# Altium PCB AD9854_V2.1_20130905.PcbDoc (part 3 of 3)
Units mil, origin at the board's own origin, x right, y up, seen from the top; angles counter-clockwise.
Board outline 3519.8 x 3096.6 mil, 2 copper layers (Top Layer, Bottom Layer); 99 components, 61 nets, 371 pads, 189 vias.
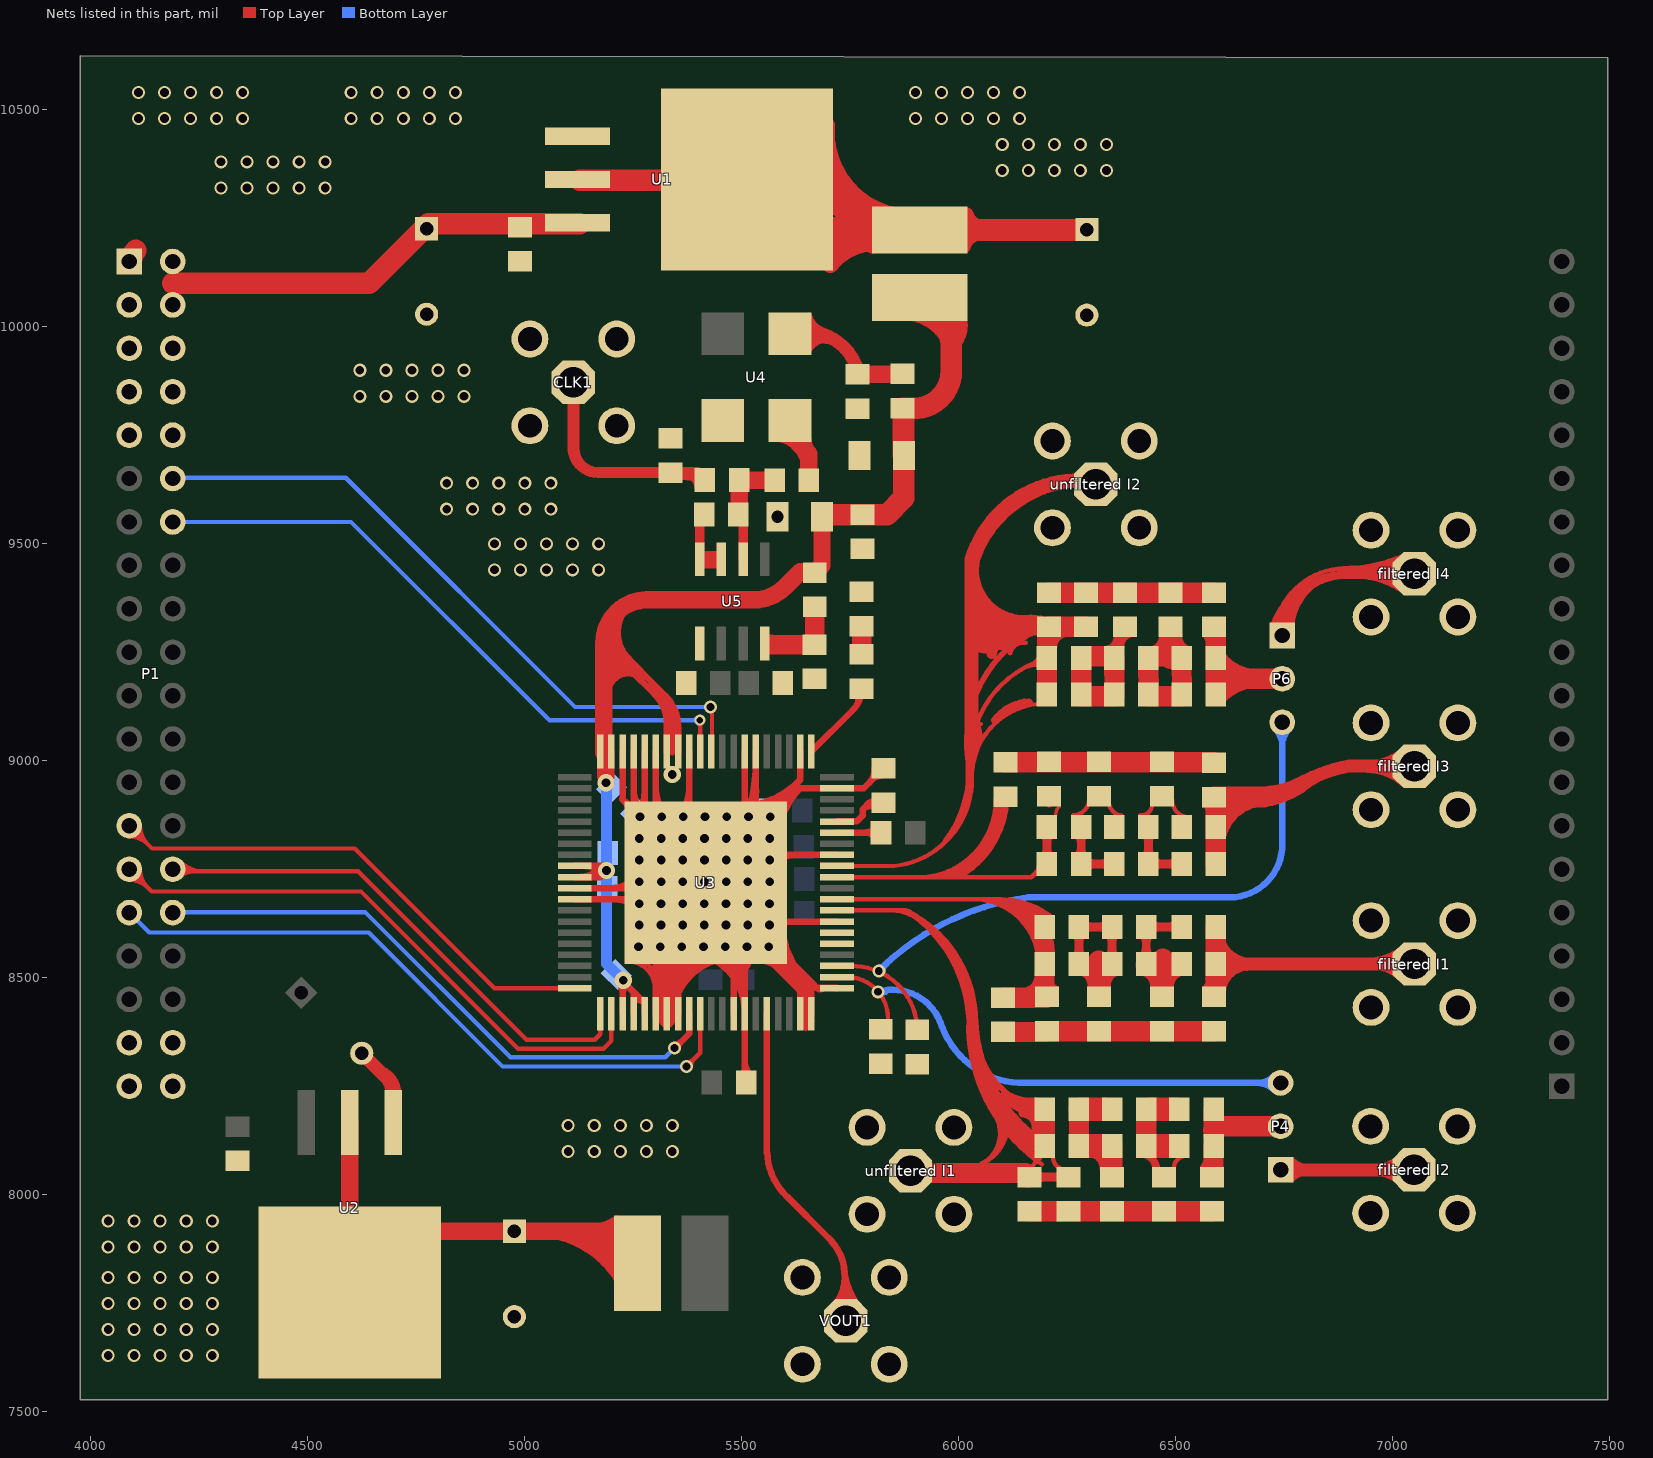
[diagram p3: the nets of this part, all layers, seen from the top]

## Via types
v1: diameter 30, hole 20, Top Layer to Bottom Layer, 120 vias
v2: diameter 40, hole 20, Top Layer to Bottom Layer, 60 vias
v3: diameter 30, hole 18, Top Layer to Bottom Layer, 5 vias
v4: diameter 100, hole 50, Top Layer to Bottom Layer, 2 vias
v5: diameter 50, hole 28, Top Layer to Bottom Layer, 1 vias
v6: diameter 25, hole 15, Top Layer to Bottom Layer, 1 vias

## Nets (pads, with @x,y where several pads share a name; then routed paths per layer and width w, separated by ;. In a path a pad name is that pad's centre, name@x,y a point inside that pad or via, vN(x,y) a via of type N, cw(c..) or ccw(c..) an arc to the next point about the centre after c; other vN are vias at no path point) (continued)
DGND: (continued)
  Top Layer w15: U3.81@5540.38,8861.12 cw(c5549.21,8852.37) 5557.18,8861.91 ccw(c5549.21,8852.37) U3.81@5540.38,8861.12 ; U3.81@5542.08,8814.44 cw(c5571.82,8811.38) 5552.96,8834.58 ccw(c5571.82,8811.38) U3.81@5542.08,8814.44 ; U3.81@5543.89,8808.36 ccw(c5599.85,8811.26) 5562.33,8769.64 cw(c5599.85,8811.26) U3.81@5543.89,8808.36
  Top Layer w30: C7.2@4624.4,8326.4 4696.8,8254 U2.1@4696.8,8166.5
  Top Layer w40: U3.81@5298.95,8601.41 cw(c5230.09,8532.56) U3.81@5327.47,8532.56 ; v2(5313.6,8622) cw(c5280.12,8588.52) U3.81@5327.47,8588.52 ; U3.27@5327.47,8404.51 cw(c5482.11,8404.51) U3.81@5450.82,8555.95 ; U3.27@5327.47,8417.5 5327.47,8629.93 ccw(c5393.51,8629.93) v2(5361.8,8572) ; U3.27@5327.47,8453.62 cw(c5471.96,8453.62) U3.81@5442.73,8595.13 ; 5327.47,8489.11 cw(c5444.69,8489.11) v2(5361.8,8572) ; 5327.47,8502.73 cw(c5461.82,8502.73) U3.81@5434.64,8634.3 ; U3.81@5327.47,8534.18 ccw(c5273.98,8534.18) v2(5311.8,8572) ; U3.81@5327.47,8534.77 cw(c5450.83,8534.77) v2(5363.6,8622) ; U3.81@5327.47,8551.83 cw(c5451.67,8551.83) U3.81@5426.54,8673.47 ; U3.81@5327.47,8609.82 cw(c5273.98,8609.82) v2(5311.8,8572) ; U3.81@5341.05,8546.9 cw(c5381.72,8534.4) v2(5361.8,8572) ; U3.81@5344.03,8599.9 cw(c5380.49,8587.33) v2(5363.6,8622) ; U3.81@5347.04,8589.63 cw(c5308.14,8623.35) v2(5311.8,8572) ; U3.81@5358.66,8612.17 ccw(c5290.72,8647.3) v2(5363.6,8670.5) ccw(c5390.05,8705.08) U3.81@5407.41,8665.15 ; 5361.02,8530.51 ccw(c5311.33,8552.19) v2(5361.8,8572) ; U3.81@5361.03,8573.06 ccw(c5303.24,8600.64) v2(5363.6,8622) ; U3.81@5378.26,8596.63 ccw(c5399.76,8564.45) v2(5361.8,8572) ; U3.81@5379.69,8644.4 ccw(c5398.68,8613.78) v2(5363.6,8622) ; U3.81@5393.4,8560.51 cw(c5416.48,8544.05) v2(5411.8,8572) cw(c5448.92,8553.45) U3.81@5435.79,8592.81 ; U3.81@5404.8,8575.58 cw(c5378.98,8625.69) v2(5361.8,8572) ; U3.81@5413.9,8624.48 cw(c5385.75,8683.96) v2(5363.6,8622) ; U3.81@5445.72,8553.39 ccw(c5431.3,8582.1) v2(5461.8,8572) ; C30.1@6208.03,8997.5 C31.1@6323.03,8997.5 C32.1@6468.03,8997.5 C33.1@6583.03,8997.5
  Top Layer w47: R2.1@6102.03,8375.5 C12.1@6201.03,8375.5 ; R9.1@6107.03,8996.5 C33.1@6587.03,8996.5 ; R8.1@6163.03,7962.5 C23.1@6253.03,7962.5 C24.1@6353.03,7962.5 C25.1@6473.03,7962.5 C26.1@6583.03,7962.5 ; C12.1@6203.03,8377.5 C13.1@6323.03,8377.5 C14.1@6468.03,8377.5 C15.1@6588.03,8377.5 ; R10.1@6208.03,9387.5 C37.1@6293.03,9387.5 C38.1@6383.03,9387.5 C39.1@6488.03,9387.5 C40.1@6588.03,9387.5
  other v1: 4040,7630 4100,7630 4160,7630 4220,7630 4280,7630 4040,7690 4100,7690 4160,7690 4220,7690 4280,7690 4040,7750 4100,7750 4160,7750 4220,7750 4280,7750 4040,7810 4100,7810 4160,7810 4220,7810 4280,7810 4040,7880 4100,7880 4160,7880 4220,7880 4280,7880 4040,7940 4100,7940 4160,7940 4220,7940 4280,7940 5100,8100 5160,8100 5220,8100 5280,8100 5340,8100 5100,8160 5160,8160 5220,8160 5280,8160 5340,8160 4930,9440 4990,9440 5050,9440 5110,9440 5170,9440 4930,9500 4990,9500 5050,9500 5110,9500 5170,9500 4820,9580 4880,9580 4940,9580 5000,9580 5060,9580 4820,9640 4880,9640 4940,9640 5000,9640 5060,9640 4620,9840 4680,9840 4740,9840 4800,9840 4860,9840 4620,9900 4680,9900 4740,9900 4800,9900 4860,9900 4300,10320 4360,10320 4420,10320 4480,10320 4540,10320 6100,10360 6160,10360 6220,10360 6280,10360 6340,10360 4300,10380 4360,10380 4420,10380 4480,10380 4540,10380 6100,10420 6160,10420 6220,10420 6280,10420 6340,10420 4110,10480 4170,10480 4230,10480 4290,10480 4350,10480 4600,10480 4660,10480 4720,10480 4780,10480 4840,10480 5900,10480 5960,10480 6020,10480 6080,10480 6140,10480 4110,10540 4170,10540 4230,10540 4290,10540 4350,10540 4600,10540 4660,10540 4720,10540 4780,10540 4840,10540 5900,10540 5960,10540 6020,10540 6080,10540 6140,10540
  other v2: 5261.8,8572 5511.8,8572 5561.8,8572 5263.6,8622 5413.6,8622 5463.6,8622 5513.6,8622 5563.6,8622 5263.6,8670.5 5313.6,8670.5 5413.6,8670.5 5463.6,8670.5 5513.6,8670.5 5563.6,8670.5 5264,8721.5 5314,8721.5 5364,8721.5 5414,8721.5 5464,8721.5 5514,8721.5 5564,8721.5 5264,8771.5 5314,8771.5 5364,8771.5 5414,8771.5 5464,8771.5 5514,8771.5 5564,8771.5 5264,8821 5314,8821 5364,8821 5414,8821 5464,8821 5514,8821 5564,8821 5265.2,8871.5 5315.2,8871.5 5365.2,8871.5 5415.2,8871.5 5465.2,8871.5 5515.2,8871.5 5565.2,8871.5
  other v5: 5582.45,9562.5
DVDD: C6.1 C19.1 C42.1 C50.2 C51.2 C52.2 C53.2 L2.2 L6.2 L16.2 U3.9 U3.10 U3.23 U3.24 U3.25 U3.73 U3.74 U3.79 U3.80 | length 4719
  Top Layer w15: U3.10@5115.03,8732.3 5173.03,8732.3 ; U3.9@5115.03,8757.89 5177.85,8757.89 v2(5188.23,8747.5) 5173.03,8732.3 ; U3.10@5121.35,8732.3 ccw(c5121.35,8814.39) v2@5179.39,8756.34 ; U3.9@5132.98,8757.89 cw(c5132.98,8692.25) v2@5179.39,8738.66 ; 5157.56,8732.3 ccw(c5157.56,8778.17) v2@5190,8745.73 ; 5169.2,8757.89 cw(c5169.2,8728.46) v2@5190,8749.27 ; 5173.92,8975.12 ccw(c5212.65,8975.12) v2@5185.27,8947.73 ; U3.80@5173.92,9011.33 ccw(c5248.86,9011.33) v2@5195.87,8958.34 ; U3.80@5173.92,9021.5 5173.92,8962.61 v2(5187.03,8949.5) ; v2@5176.18,8744.19 cw(c5164.37,8740.95) 5173.03,8732.3 ; v2@5178.19,8958.34 ccw(c5127.88,9008.65) U3.79@5199.03,9008.65 ; 5182.03,9018.72 5187.03,9013.72 v2(5187.03,8949.5) ; 5182.03,9271 5243.61,9209.42 5298.18,9154.86 cw(c5227.47,9084.15) 5327.47,9084.15 U3.74@5327.47,9021.5 ; 5183.85,9289.83 5213.43,9260.25 5323.77,9149.91 cw(c5253.06,9079.2) 5353.06,9079.2 U3.73@5353.06,9021.5 ; v2@5184.93,8735.45 ccw(c5181.69,8723.64) 5173.03,8732.3 ; v2@5188.8,8947.73 ccw(c5164.1,8972.43) 5199.03,8972.43 ; U3.79@5199.51,9021.5 5199.03,9021.02 5199.03,8961.5 v2(5187.03,8949.5) ; v2@5217.79,8485.66 cw(c5200.15,8468.01) 5225.1,8468.01 ; U3.23@5225.1,8417.5 5225.1,8492.97 5250.69,8467.38 ; 5225.1,8460.63 cw(c5260.5,8460.63) v2@5235.47,8485.66 ; U3.24@5250.69,8417.5 5250.69,8467.38 ; U3.24@5250.69,8449 cw(c5257.06,8422.56) U3.25@5276.28,8441.79 ; 5263.98,8454.1 ccw(c5276.29,8466.41) U3.25@5276.29,8449 ; U3.25@5276.29,8417.5 U3.25@5276.29,8441.79 ; 5289.63,9173.5 5310.94,9152.19 cw(c5240.23,9081.48) 5340.23,9081.48 ; U3.74@5327.47,9053 ccw(c5302.09,9081.48) 5340.23,9081.48 ; 5340.23,9019.5 5340.23,9081.48 ; U3.73@5353.06,9053 cw(c5378.26,9081.48) 5340.23,9081.48 ; C42.1@5684.81,9562.5 C42.1@5689.31,9567 ; L6.2@5870.43,9818.26 L6.2@5890.79,9818.26 ; 5250.69,8467.38 U3.25@5276.29,8441.79
  Top Layer w30: 5189.43,9178.5 cw(c5238.53,9155.4) 5243.61,9209.42 cw(c5238.53,9155.4) 5253.53,9207.55 ; 5191.63,9214 ccw(c5190.58,9231.45) 5208.03,9232.5 ; 5230.63,9357.5 ccw(c5297.63,9295.5) 5229.18,9355.89 ccw(c5297.63,9295.5) 5213.43,9260.25 ccw(c5297.63,9295.5) 5235.63,9228.5 ; L2.2@5849.12,10029.64 cw(c5867.66,9907.13) 5982.63,9953.32 ; L2.2@5981.63,10050 cw(c5945.53,10002.1) 5993.43,9966
  Top Layer w40: 5182.03,9018.72 5182.03,9271 cw(c5282.03,9271) 5229.18,9355.89 cw(c5282.03,9271) 5282.03,9371 5528.01,9371 ccw(c5528.01,9471) 5598.72,9400.29 5634.43,9436 ; L16.2@5668.03,9433.74 5684.81,9450.52 C42.1@5684.81,9562.5
  Top Layer w50: C42.1@5689.31,9567 C6.1@5778.43,9567 5834.53,9567 5873.21,9605.68 C19.1@5873.21,9704 5872.53,9704.68 L6.2@5872.53,9812.76 ; L6.2@5870.43,9812.76 L6.2@5872.53,9812.76 ; L6.2@5893.82,9811.82 ccw(c5895.93,9898.5) 5982.61,9896.4 ; L6.2@5895.93,9812.76 L6.2@5872.53,9812.76 ; L2.2@5909.63,10067.74 5953.34,10024.03 cw(c5882.63,9953.32) 5982.63,9953.32 5982.63,9898.5 ; 5969.82,9995.5 cw(c6000.6,10013.27) L2.2@5981.44,10043.21
  Bottom Layer w15: v2(5187.03,8949.5) 5198.03,8949.5 5199.03,8948.5 C50.2@5188.43,8937.9
  Bottom Layer w25: C50.2@5181.73,8944.2 cw(c5165.55,8928.01) C50.2@5188.43,8928.01 ; 5188.23,8532.9 v2(5188.23,8747.5) ; 5188.43,8532.7 v2(5226.63,8494.5) ; v2@5188.43,8747.5 C50.2@5188.43,8937.9
  other v2: 5340,8968.5
DVDDIN: C1.1 C3.1 P1.1 P1.2 P1.3 P1.4 U1.3 | length 1050.8
  Top Layer w50: 4189.2,10100.5 4641.23,10100.5 4772.8,10232.07 4778.23,10237.5 U1.3@5126.6,10237.5 ; P1.1@4093.36,10150.5 cw(c4129.4,10150.5) 4103.92,10175.98 ccw(c4129.4,10150.5) P1.1@4093.36,10150.5
FSK: P1.32 U3.29 | length 1419.9
  Top Layer w15: v3@5344.83,8346 ccw(c5344.83,8365.8) 5358.83,8351.8 ; v3@5345.18,8338.15 5378.65,8371.61 U3.29@5378.65,8417.5 ; v3@5352.33,8338.5 cw(c5368.75,8338.5) 5357.14,8350.11
  Bottom Layer w10: P1.32@4193.83,8651 4632.73,8651 4966.73,8317 5323.33,8317 v3(5344.83,8338.5)
NetC4_1: C4.1 L1.1 U2.2 U2.4 | length 2096.3
  Top Layer w25: C4.1@4995.83,7914 cw(c5022.09,7684.87) L1.1@5236.23,7770.5 ; 5075.97,7910.81 cw(c5089.23,7752.2) L1.1@5247.03,7773 ; 5146.23,7893.5 cw(c5194.82,7860.16) L1.1@5213.63,7916 ; 5161.43,7916.43 cw(c5168.03,7863.83) L1.1@5220.63,7870.43 ; 5162.18,7921.31 ccw(c5141.88,8053.55) L1.1@5213.43,7940.5 ; 5185.68,7917.77 cw(c5180.03,7828.43) L1.1@5247.2,7887.61 ; 5195.11,7917.17 ccw(c5198.34,7968.22) L1.1@5232.15,7929.84 ; L1.1@5233.03,7910.5 cw(c5204.61,7944.85) 5170.25,7916.43 L1.1@5265.68,7821
  Top Layer w40: U2.2@4596.8,8166.5 U2.4@4596.8,7775.5 4737.73,7916.43 C4.1@4976.03,7916.43 5170.25,7916.43
NetC8_1: C8.1 L2.1 U1.2 U1.4 | length 2378
  Top Layer w30: L2.1@6013.03,10185.5 cw(c6049.53,10176) 6059.03,10212.5 ; L2.1@6019.23,10260.5 ccw(c6051.63,10265.9) 6057.03,10233.5
  Top Layer w40: U1.4@5694.65,10464.07 ccw(c5891.78,10449.35) L2.1@5855.63,10255 ; U1.4@5703.83,10144.5 cw(c5807.91,10060.24) L2.1@5830.96,10192.15 ; L2.1@5800.52,10189.44 ccw(c5793,10273.89) L2.1@5858.03,10219.49
  Top Layer w50: U1.2@5126.6,10337.5 U1.4@5517.6,10337.5 ; U1.4@5657.23,10392.5 ccw(c5841.98,10424.75) 5798.15,10242.4 ; 5716.23,10184.5 cw(c5832.31,10107.18) 5754.99,10223.26 cw(c5832.31,10107.18) 5798.15,10242.4 ; L2.1@5874.23,10240 cw(c5841.98,10424.75) 5798.15,10242.4 ; L2.1@5986.34,10202.66 cw(c6036.07,10152.92) 6036.07,10223.26 cw(c6036.07,10293.59) L2.1@5986.34,10243.86 ; C8.1@6294.16,10223.26 L2.1@5909.63,10223.26 ccw(c5832.31,10107.18) 5798.15,10242.4
  Top Layer w60: U1.4@5631.58,10223.26 5754.99,10223.26 L2.1@5909.63,10223.26 ; L2.1@5836.47,10206.19 ccw(c5795.27,10164.99) 5795.27,10223.26 ccw(c5795.27,10281.52) L2.1@5836.47,10240.32
NetC9_1: C9.1 C12.2 L3.1 R2.2 U3.49 | length 2113.1
  Top Layer w10: U3.49@5719.03,8681.11 6097.21,8681.11 cw(c6096.08,8586.79) C9.1@6190.03,8595.24 ; 6032.93,8681.11 cw(c6033.42,8530.82) 6033.91,8681.11 cw(c6033.42,8530.82) L3.1@6183.68,8527.65 ; 6087.23,8681.11 cw(c6093.93,8579.81) C9.1@6186.4,8621.72 ; 6092.03,8674.5 cw(c6062.41,8542.97) 6192.12,8579.76 ; 6094.82,8681.07 cw(c6097.21,8610.37) 6167.95,8610.29 ; 6094.82,8681.32 cw(c6094.83,8486.7) C9.1@6216.63,8638.5 ; 6150.83,8664.5 cw(c6145.88,8599.95) C9.1@6210.43,8595 ; 6151.94,8663.69 ccw(c6202.13,8704.89) C9.1@6198.95,8640.04 ; 6157.96,8637 ccw(c6180.6,8654) C9.1@6193.96,8629.04 ; 6164.95,8627.68 ccw(c6186.17,8643.6) C9.1@6198.68,8620.22 ; 6166.26,8646.25 ccw(c6200.64,8674.47) C9.1@6198.46,8630.05 ; 6171.95,8618.37 ccw(c6191.73,8633.21) C9.1@6203.4,8611.41 ; C9.1@6175.61,8634.56 ccw(c6196.46,8642.21) C9.1@6198.14,8620.06 ; C9.1@6176.2,8634.15 cw(c6164.7,8624.72) C9.1@6179.5,8623.26 ; 6215.53,8496 ccw(c6230.53,8491.5) C12.2@6226.03,8476.5
  Top Layer w12: 6146.64,8471.09 ccw(c6146,8505.23) L3.1@6180.03,8508
  Top Layer w20: 6109.8,8666.74 cw(c6110.9,8628.64) 6143.43,8648.5
  Top Layer w40: 6156.29,8643.49 cw(c6100.45,8559.83) 6161.58,8639.7 cw(c6100.45,8559.83) L3.1@6201.03,8559.5 ; 6160.27,8641.2 ccw(c6196.02,8672.61) C9.1@6197.89,8625.06 ; L3.1@6194.9,8538.26 ccw(c6161.39,8557.76) 6198.87,8567.67 ; 6196.08,8578.07 cw(c6237.33,8589.06) C9.1@6201.11,8611.65
  Top Layer w45: C12.2@6198.03,8461.24 L3.1@6198.03,8532.5
  Top Layer w47: R2.2@6102.03,8454.24 C12.2@6201.03,8454.24
NetC9_2: C9.2 C10.1 C13.2 L3.2 L5.1 | length 721.9
  Top Layer w10: L3.2@6273.01,8511.71 cw(c6272.78,8483.21) C13.2@6301.03,8479.5 ; C13.2@6346.03,8478.5 cw(c6374.38,8483.34) L5.1@6366.61,8511.02
  Top Layer w20: L3.2@6267.14,8546.07 ccw(c6243.89,8569.32) 6276.77,8569.32 ccw(c6309.66,8569.32) L3.2@6286.41,8546.07 ; C9.2@6267.14,8603.93 cw(c6243.89,8580.68) 6276.77,8580.68 cw(c6309.66,8580.68) C9.2@6286.41,8603.93 ; L3.2@6276.77,8532.5 C9.2@6276.77,8617.5 C10.1@6353.03,8617.5 L5.1@6353.03,8532.5 ; C9.2@6286.41,8607.87 cw(c6309.66,8584.61) 6309.66,8617.5 cw(c6309.66,8650.39) C9.2@6286.41,8627.13 ; L5.1@6343.4,8546.07 ccw(c6320.15,8569.32) 6353.03,8569.32 ccw(c6385.92,8569.32) L5.1@6362.67,8546.07 ; C10.1@6343.4,8603.93 cw(c6320.15,8580.68) 6353.03,8580.68 cw(c6385.92,8580.68) C10.1@6362.67,8603.93 ; C10.1@6343.4,8607.87 ccw(c6320.15,8584.61) 6320.15,8617.5 ccw(c6320.15,8650.39) C10.1@6343.4,8627.13
  Top Layer w50: C13.2@6323.03,8463.24 6323.03,8538.5
NetC10_2: C10.2 C11.1 C14.2 L4.1 L5.2 | length 777.4
  Top Layer w10: L5.2@6415.53,8510.5 cw(c6416.48,8481.07) C14.2@6445.9,8479.79 ; C14.2@6490.69,8478.98 cw(c6520.08,8480.85) L4.1@6516.02,8510.01
  Top Layer w20: L5.2@6422.14,8546.07 ccw(c6398.89,8569.32) 6431.77,8569.32 ccw(c6464.66,8569.32) L5.2@6441.41,8546.07 ; C10.2@6422.14,8603.93 cw(c6398.89,8580.68) 6431.77,8580.68 cw(c6464.66,8580.68) C10.2@6441.41,8603.93 ; L5.2@6431.77,8532.5 C10.2@6431.77,8617.5 C11.1@6513.03,8617.5 ; C10.2@6441.41,8607.87 cw(c6464.66,8584.61) 6464.66,8617.5 cw(c6464.66,8650.39) C10.2@6441.41,8627.13 ; 6470.03,8505 6485.53,8505 ; L4.1@6492.56,8512.03 ccw(c6476.03,8528.56) L4.1@6499.41,8528.56 ; C11.1@6503.4,8607.87 ccw(c6480.15,8584.61) 6480.15,8617.5 ccw(c6480.15,8650.39) C11.1@6503.4,8627.13 ; L4.1@6512.11,8514.97 ccw(c6509.8,8480.74) 6485.53,8505 ; L4.1@6513.03,8532.5 6485.53,8505
  Top Layer w50: C14.2@6470.03,8462.24 6470.03,8505 6470.03,8542.5 ; L5.2@6432.04,8529.91 cw(c6422.84,8483.63) 6470.03,8483.63 ccw(c6422.84,8483.63) L5.2@6432.04,8529.91
NetC11_2: "filtered I1.1" C11.2 C15.2 L4.2 | length 1094.3
  Top Layer w10: C15.2@6565.03,8476 ccw(c6549.28,8493.75) 6572.53,8498.5
  Top Layer w15: 6605.88,8586.58 ccw(c6671.13,8607.9) 6661.03,8540 ; 6606.03,8573 ccw(c6640.28,8575.75) 6643.03,8541.5 ; C15.2@6608.58,8474.37 cw(c6667.88,8463.95) 6663.43,8524 ; 6616.43,8500 cw(c6646.08,8498.85) 6647.23,8528.5 ; 6928.43,8539 ccw(c6938.63,8672.2) 7021.99,8567.8 ; 6929.23,8525.5 cw(c6947.93,8424.8) 7020.76,8496.81
  Top Layer w30: L4.2@6591.77,8532.5 7047.43,8532.5
  Top Layer w47: L4.2@6591.77,8532.5 C11.2@6591.77,8617.5
  Top Layer w48: C15.2@6591.77,8459.98 L4.2@6591.77,8532.5
NetC16_1: C16.1 U3.55 | length 162.6
  Top Layer w15: U3.55@5719.03,8834.66 C16.1@5820.48,8834.66 ; 5781.33,8834.66 cw(c5781.33,8795.2) C16.1@5809.23,8823.1 ; 5782.09,8834.66 ccw(c5782.09,8873.04) C16.1@5809.23,8845.9
NetC17_1: C17.1 R4.2 | length 65.3
  Top Layer w45: C17.1@5775.83,9310.5 5776.03,9310.3 R4.2@5776.03,9245.24
NetC18_1: C18.1 L6.1 U4.4 | length 643.3
  Top Layer w10: U4.4@5649.03,9957.5 cw(c5678.88,9936.15) 5700.23,9966 ; U4.4@5650.03,9948.5 cw(c5688.08,9916.95) 5719.63,9955 ; U4.4@5655.03,9944 cw(c5696.33,9920.7) 5719.63,9962
  Top Layer w15: U4.4@5654.43,10026 ccw(c5704.23,10039.8) 5687.06,9991.06
  Top Layer w30: U4.4@5611.03,9984 cw(c5647.23,9864.8) C18.1@5766.43,9901 ; U4.4@5638.71,10004.11 ccw(c5674.04,10029.77) 5675.48,9986.13 ccw(c5676.92,9942.49) U4.4@5639.98,9965.76
  Top Layer w40: C18.1@5766.43,9890.5 L6.1@5869.43,9890.5
NetC20_1: "unfiltered I1.1" C20.1 C23.2 L7.1 R8.2 U3.48 | length 4484.1
  Top Layer w10: U3.48@5719.03,8655.52 5877.63,8655.52 ; 5845.03,8655.52 cw(c5843.07,8549.96) 5914.25,8627.94 ; 5861.43,8655.5 cw(c5861.58,8597.85) 5903.34,8637.6 ; 5885.83,8652.5 cw(c5751.28,8397.55) 6039.54,8400.83 ; 5894.14,8644.79 ccw(c5875.87,8634.76) 5877.63,8655.52 ; 5986.23,8065 ccw(c6010.38,8164.65) 6110.03,8140.5 ; 6023.83,8397.5 ccw(c6431.88,8409.05) 6186.12,8083.11 ; 6032.16,8401.07 ccw(c5713.77,8381.86) 5877.63,8655.52 ; 6040.17,8385.02 ccw(c6237.38,8387.45) C20.1@6180.83,8198.5 ; 6049.83,8330.5 ccw(c6170.13,8339.8) C20.1@6179.43,8219.5 ; 6053.43,8073 ccw(c6011.93,8151.5) 6090.43,8193 ; 6074.43,8089 ccw(c6013.68,8142.75) 6082.62,8185.5 ; 6155.57,8208.71 ccw(c6165.74,8233.89) C20.1@6184.9,8214.64 ; R8.2@6156.12,8060.84 ccw(c6151.96,8087.6) 6178,8080.19 ; 6169.61,8203.03 ccw(c6177.36,8222.21) C20.1@6191.95,8207.55 ; 6173.44,8201.49 cw(c6168.32,8188.83) C20.1@6180.89,8194.16 ; 6177.36,8075.35 cw(c6228.69,8068.56) L7.1@6197.19,8109.66 ; L7.1@6179.03,8087.99 cw(c6151.96,8087.6) 6178,8080.19 ; 6191.61,8070.55 cw(c6407.76,8390.17) 6178,8080.19 ; L7.1@6217.07,8087.53 ccw(c6244.13,8086.58) C23.2@6244.52,8059.5 ; 5877.63,8655.52 cw(c5703.97,8388.66) 6022.09,8401.9 ccw(c6407.76,8390.17) 6178,8080.19
  Top Layer w11: 6026.21,8399.46 ccw(c6416.74,8412.08) L7.1@6183.63,8098.5
  Top Layer w20: 6106.03,8232 ccw(c6172.33,8269.3) C20.1@6209.63,8203 ; 6147.83,8188 cw(c6146.73,8157.1) 6177.63,8156 ; 6150.23,8212.5 ccw(c6161.33,8230.6) 6172.08,8212.29 ; R8.2@6163.03,8041.24 C23.2@6253.03,8041.24 ; R8.2@6176.6,8031.61 cw(c6199.86,8008.35) 6199.86,8041.24 cw(c6199.86,8074.13) R8.2@6176.6,8050.87 ; C23.2@6239.46,8031.61 ccw(c6216.21,8008.35) 6216.21,8041.24 ccw(c6216.21,8074.13) C23.2@6239.46,8050.87
  Top Layer w27: 6032.16,8401.07 ccw(c6386.08,8412.42) L7.1@6196.83,8113.14 ; 6171.5,8135.23 ccw(c6194.92,8162.08) L7.1@6197.34,8126.54
  Top Layer w47: 5901.23,8050.5 R8.2@6153.77,8050.5 ; R8.2@6136.45,8050.5 cw(c6136.45,8018.59) R8.2@6159.01,8041.15 ; L7.1@6198.03,8112.5 C20.1@6198.03,8197.5
NetC20_2: C20.2 C21.1 C24.2 L7.2 L9.1 | length 307.4
  Top Layer w12: 6309.67,8090.99 cw(c6297.01,8059.94) C24.2@6330.53,8059.5
  Top Layer w47: L7.2@6276.77,8112.5 C20.2@6276.77,8197.5
  Top Layer w50: C24.2@6351.53,8043.74 L9.1@6351.53,8115
  Top Layer w55: C20.2@6280.53,8197.5 C21.1@6335.53,8197.5 ; L7.2@6285.03,8112.5 L9.1@6341.03,8112.5
NetC21_2: C21.2 C22.1 C25.2 L8.1 L9.2 | length 376.5
  Top Layer w10: L9.2@6421.03,8090 cw(c6420.78,8060.25) C25.2@6450.53,8060 ; L9.2@6429.03,8091.5 cw(c6428.78,8061.75) C25.2@6458.53,8061.5 ; C25.2@6453.05,8050.69 ccw(c6429.45,8064.58) 6455.96,8071.44 ; 6457.3,8066.27 ccw(c6481.6,8072.56) C25.2@6472.29,8049.25 ; C25.2@6495.53,8058.5 cw(c6524.03,8061.5) L8.1@6521.03,8090
  Top Layer w47: L9.2@6431.77,8112.5 C21.2@6431.77,8197.5
  Top Layer w55: C21.2@6442.53,8197.5 C22.1@6500.03,8197.5 ; L9.2@6444.53,8112.5 L8.1@6495.03,8112.5
NetC22_2: C22.2 C26.2 L8.2 P4.2 | length 485.5
  Top Layer w10: C26.2@6560.03,8063.5 ccw(c6524.92,8091.37) L8.2@6569.75,8091.46
  Top Layer w15: L8.2@6572.19,8121.17 cw(c6658.62,8120.38) C22.2@6598.07,8182.06 ; L8.2@6572.23,8126 cw(c6705.4,8148.22) C22.2@6572.66,8172.89 ; 6572.5,8154.59 ccw(c6625.14,8154.11) L8.2@6587.57,8117.22 ; 6572.52,8157.38 cw(c6622.75,8156.92) C22.2@6587.56,8192.76
  Top Layer w47: C26.2@6586.77,8044.98 L8.2@6586.77,8112.5 ; 6586.77,8158 C22.2@6586.77,8197.5 ; 6587.77,8158 P4.2@6740.23,8158
NetC27_1: C27.1 C30.2 L10.1 R9.2 U3.51 | length 1262.4
  Top Layer w8: 6223.54,8875.76 cw(c6244.14,8877.98) 6231.63,8894.5
  Top Layer w10: U3.51@5719.03,8732.3 6166.83,8732.3 ; 5906.04,8731.74 ccw(c5906.15,8910.64) R9.2@6085.03,8912.5 ; 6178.27,8743.74 ccw(c6163.44,8758.56) L10.1@6184.41,8758.56 ; 6179.01,8744.47 cw(c6194.85,8728.63) L10.1@6200.76,8750.25 ; L10.1@6187.03,8752.5 6166.83,8732.3 ; L10.1@6198.12,8740.6 ccw(c6189.63,8709.5) 6166.83,8732.3
  Top Layer w20: 5977.32,8740.55 ccw(c5977.32,8762.55) 5995.03,8749.5 ; L10.1@6193.4,8776.07 ccw(c6170.15,8799.32) 6203.03,8799.32 ccw(c6235.92,8799.32) L10.1@6212.67,8776.07 ; C27.1@6193.4,8833.93 cw(c6170.15,8810.68) 6203.03,8810.68 cw(c6235.92,8810.68) C27.1@6212.67,8833.93 ; L10.1@6203.03,8762.5 C27.1@6203.03,8847.5 ; C30.2@6208.03,8902.5 C30.2@6208.03,8918.76
  Top Layer w30: 6000.39,8743.33 ccw(c5895.82,8920.45) 6099.21,8889.78
NetC27_2: C27.2 C28.1 C31.2 L10.2 L12.1 | length 487.3
  Top Layer w10: C27.2@6263.03,8874.5 ccw(c6261.53,8913.48) C31.2@6300.43,8916.42 ; C31.2@6345.54,8914.04 ccw(c6380.08,8908.28) C28.1@6376.03,8873.5
  Top Layer w20: L10.2@6272.14,8776.07 ccw(c6248.89,8799.32) 6281.77,8799.32 ccw(c6314.66,8799.32) L10.2@6291.41,8776.07 ; C27.2@6272.14,8833.93 cw(c6248.89,8810.68) 6281.77,8810.68 cw(c6314.66,8810.68) C27.2@6291.41,8833.93 ; C27.2@6281.77,8847.5 L10.2@6281.77,8762.5 L12.1@6358.03,8762.5 ; L10.2@6291.41,8752.87 cw(c6314.66,8729.61) 6314.66,8762.5 cw(c6314.66,8795.39) L10.2@6291.41,8772.13 ; L12.1@6348.4,8752.87 ccw(c6325.15,8729.61) 6325.15,8762.5 ccw(c6325.15,8795.39) L12.1@6348.4,8772.13
NetC28_2: C28.2 C29.1 C32.2 L11.1 L12.2 | length 475.7
  Top Layer w10: C28.2@6418.08,8874.5 ccw(c6419.32,8901.07) C32.2@6445.79,8903.67 ; C32.2@6492.03,8910.5 ccw(c6530.11,8908.46) C29.1@6530.36,8870.32
  Top Layer w20: L12.2@6427.14,8776.07 ccw(c6403.89,8799.32) 6436.77,8799.32 ccw(c6469.66,8799.32) L12.2@6446.41,8776.07 ; C28.2@6427.14,8833.93 cw(c6403.89,8810.68) 6436.77,8810.68 cw(c6469.66,8810.68) C28.2@6446.41,8833.93 ; C28.2@6436.77,8847.5 L12.2@6436.77,8762.5 L11.1@6513.03,8762.5 ; L12.2@6446.41,8752.87 cw(c6469.66,8729.61) 6469.66,8762.5 cw(c6469.66,8795.39) L12.2@6446.41,8772.13 ; L11.1@6503.4,8752.87 ccw(c6480.15,8729.61) 6480.15,8762.5 ccw(c6480.15,8795.39) L11.1@6503.4,8772.13
NetC29_2: "filtered I3.1" C29.2 C33.2 L11.2 | length 1579.6
  Top Layer w5: C33.2@6563.03,8895.5 cw(c6561.63,8887.49) 6569.74,8886.94
  Top Layer w10: 6683.86,8935.64 ccw(c6684.28,9178.25) 6812.03,8972 ; 6705.67,8898.21 ccw(c6671.53,9113.5) 6819.03,8953 ; 6769.23,8951 cw(c7063.18,8391.55) 6813.31,8972.03 ; 6804.75,8941.29 cw(c6905.68,8804.35) 6855.83,8967
  Top Layer w15: C29.2@6610.03,8829.5 cw(c6706.78,8802.25) 6700.89,8902.59
  Top Layer w25: 6916.03,8988 ccw(c6932.08,9142.55) 7031.08,9022.79
  Top Layer w30: C29.2@6598.83,8866.5 ccw(c6593.83,8907.5) 6634.83,8912.5 ; C29.2@6599.85,8848.41 cw(c6649.34,8829.88) 6629.58,8878.89 ; 6702.75,8916.33 ccw(c6648.43,9207.89) 6813.86,8961.74 ; 6817.05,8963.33 cw(c6963.26,8624.91) 6899.43,8988 7042.43,8988 ; 6942.46,8986.86 cw(c6941.18,8856.25) 7027.26,8954.49 ; 6963.93,8988 cw(c6963.93,8901.8) 7024.88,8962.75 ; 6966.34,8988 ccw(c6966.34,9070.79) 7024.88,9012.25
  Top Layer w48: C33.2@6588.03,8916.76 6702.75,8916.76 ; L11.2@6591.77,8762.5 C29.2@6591.77,8847.5 C33.2@6591.77,8914.52
NetC34_1: "unfiltered I2.1" C34.1 C37.2 L13.1 R10.2 U3.52 | length 5827.4
  Top Layer w10: U3.52@5719.03,8757.89 5851.35,8757.89 ccw(c5829.88,8957.04) 6030.18,8958.5 cw(c6198.66,8963.53) L13.1@6193.63,9132 ; 5942.58,8791.45 ccw(c5822.58,8956.95) 6021.03,9006 ; 5957.19,8802.09 ccw(c5748.38,8980.05) 6020.43,9015.5 ; 6017.47,8925.74 ccw(c5901.08,8951.25) 6019.83,8961 ; 6020.43,8921.5 6020.43,9036.5 ; 6021.57,8928.2 cw(c6492.48,8968.05) 6028.43,9057.5 ; 6024.23,9070 ccw(c6022.38,9074.65) 6027.03,9076.5 ; 6024.83,9019.1 cw(c6070.48,9039.35) 6050.23,9085 ; 6027.83,9026.5 ccw(c6010.08,9061.25) 6044.83,9079 ; 6029.7,8967.95 cw(c6266.13,9004.8) C34.1@6221.26,9239.85 ; 6118.43,9247.5 cw(c6148.68,9241.75) 6154.43,9272 ; 6160.28,9218.08 ccw(c6144.92,9261.1) C34.1@6186.2,9241.54 ; 6161.25,9218.42 cw(c6176.12,9176.76) C34.1@6195.06,9216.73 ; C34.1@6222.03,9264 cw(c6250.53,9262) 6252.53,9290.5
  Top Layer w13: 6025.89,8980.42 cw(c6303.93,9046) R10.2@6221.43,9319.5 ; 6160.51,9290.92 cw(c6181.49,9246.2) R10.2@6198.28,9292.66 ; 6170.83,9295.76 ccw(c6156.7,9325.89) R10.2@6187.99,9314.58
  Top Layer w15: 6020.63,9465 cw(c6274.23,9390.4) 6348.83,9644 ; 6027.03,9400.5 cw(c6289.58,9374.45) 6315.63,9637 ; 6027.03,9464 cw(c6279.18,9381.35) 6338.19,9640.06 ; 6220.43,9640.1 ccw(c6220.46,9732.24) 6285.59,9667.06 ; 6229.56,9648.76 cw(c6225.79,9554.04) 6295.43,9618.34 ; 6233.51,9648.6 ccw(c6236.46,9722.75) 6286.8,9668.23 ; 6241.85,9640.09 cw(c6241.82,9563.24) 6296.18,9617.56 ; 6256.64,9640.09 ccw(c6256.66,9696.01) 6296.19,9656.45 ; 6265.75,9647.31 cw(c6263.41,9588.78) 6306.45,9628.52
  Top Layer w20: 6084.63,9093.5 cw(c6166.18,9032.45) 6160.9,9134.18
  Top Layer w25: 6031.63,9284 ccw(c6061.98,9290.85) 6068.83,9260.5 ; 6035.23,9341.5 ccw(c6118.33,9373.6) 6150.43,9290.5 ; 6035.43,9301 ccw(c6091.73,9332.3) 6123.03,9276 ; 6043.85,9486.25 ccw(c6149.64,9439.49) 6154.7,9323.94 ; 6045.23,9355.5 ccw(c6129.53,9400.8) 6174.83,9316.5 ; 6075.63,9247.5 cw(c6169.13,9229) R10.2@6187.63,9322.5 ; 6157.36,9320.48 cw(c6160.17,9278.18) R10.2@6194.97,9302.41
  Top Layer w33: 6029.03,9026.5 6029.03,9463.5
  Top Layer w47: L13.1@6203.03,9152.5 C34.1@6203.03,9237.5 R10.2@6203.03,9303.76 ; R10.2@6208.03,9308.76 C37.2@6293.03,9308.76
NetC34_2: C34.2 C35.1 C38.2 L13.2 L15.1 | length 453.9
  Top Layer w10: C35.1@6341.03,9260.5 ccw(c6336.03,9285) C38.2@6360.53,9290 ; C35.1@6376.53,9262.5 cw(c6402.03,9264.5) C38.2@6400.03,9290
  Top Layer w25: C35.1@6368.38,9255.35 C38.2@6368.38,9301.61
  Top Layer w47: C34.2@6281.77,9237.5 6282.27,9148.5 6358.53,9148.5 6358.51,9152.5 C35.1@6358.03,9237.5 6354.53,9241 C34.2@6285.53,9241
NetC35_2: C35.2 C36.1 C39.2 L14.1 L15.2 | length 484.1
  Top Layer w10: C35.2@6440.53,9259 ccw(c6437.78,9287.25) C39.2@6466.03,9290 ; C39.2@6510.53,9290 ccw(c6536.03,9285.5) C36.1@6531.53,9260
  Top Layer w47: C35.2@6436.77,9237.5 6458.34,9241.5 C36.1@6496.47,9241.5 ; C35.2@6441.53,9234.5 6436.77,9229.74 6437.72,9152.51 6437.77,9148.5 6514.03,9148.5 6513.99,9152.51 C36.1@6513.03,9237.5 6488.03,9237.5
  Top Layer w52: 6488.03,9237.5 C39.2@6488.03,9298
NetC36_2: C36.2 C40.2 L14.2 P6.2 | length 475.1
  Top Layer w10: C40.2@6565.53,9289.5 cw(c6547.23,9271.29) 6573.03,9270.5
  Top Layer w30: L14.2@6600.03,9142.5 cw(c6687.93,9067.6) 6674.61,9182.31 ; C36.2@6601.63,9239.5 ccw(c6687.58,9303.95) 6687.21,9196.52
  Top Layer w47: C36.2@6591.53,9240.74 C40.2@6591.53,9308.26 ; 6591.77,9189 C36.2@6591.77,9237.5 ; 6592.77,9189 P6.2@6745.03,9189
NetC41_2: C41.2 L16.1 U5.8 | length 189.5
  Top Layer w45: 5565.83,9268.5 ccw(c5567.67,9270.33) 5567.67,9267.74 C41.2@5667.83,9267.74 5667.83,9354.8 L16.1@5668.03,9355
NetC43_1: C43.1 CLK1.1 R11.2 | length 944.8
  Top Layer w10: 5103.23,9724.5 ccw(c5169.33,9722.6) 5167.43,9656.5 ; 5118.63,9719.5 ccw(c5168.33,9721.2) 5170.03,9671.5 cw(c5169.98,9720.05) 5121.43,9720 ; 5367.63,9657 cw(c5367.28,9628.85) C43.1@5395.43,9628.5
  Top Layer w20: 5111.83,9723 ccw(c5170.53,9722.96) 5170.49,9664.26
  Top Layer w25: 5170.49,9664.26 R11.2@5335.43,9664.26 C43.1@5397.77,9664.26 ; R11.2@5323.63,9656.4 ccw(c5304.65,9637.41) 5304.65,9664.26 ccw(c5304.65,9691.11) R11.2@5323.63,9672.12 ; R11.2@5344.93,9654.63 cw(c5365.71,9618.63) 5376.47,9658.78 ; R11.2@5347.23,9656.4 cw(c5366.22,9637.41) 5366.22,9664.26 cw(c5366.22,9691.11) R11.2@5347.23,9672.12 ; R11.2@5356.02,9664.26 cw(c5356.02,9591.92) C43.1@5407.17,9643.07
  Top Layer w28: 5111.83,9723 CLK1.1@5111.83,9872
NetC43_2: C43.2 R1.1 R5.2 U5.2 | length 251.9
  Top Layer w22: U5.2@5503.03,9464.5 R1.1@5503.03,9557
  Top Layer w40: R1.1@5493.77,9569.74 C43.2@5493.77,9647 5494.27,9646.5 R5.2@5575.69,9646.5
"Netfiltered I2_1": "filtered I2.1" P4.1 | length 630.6
  Top Layer w15: P4.1@6766.13,8079.46 ccw(c6832.78,8167.95) 6819.23,8058 ; P4.1@6766.26,8036.12 cw(c6819.98,7981.65) 6824.83,8058 ; 6948.43,8050.5 cw(c6958.23,7964.7) 7021.42,8023.57 ; 6949.43,8065 ccw(c6958.88,8148.95) 7009.76,8081.51
  Top Layer w30: P4.1@6740.23,8058 7048.63,8058 ; P4.1@6751.51,8047.73 cw(c6776.31,8022.93) 6776.31,8058 cw(c6776.31,8093.07) P4.1@6751.51,8068.27
"Netfiltered I4_1": "filtered I4.1" P6.1 | length 2276.9
  Top Layer w10: P6.1@6722.51,9314.2 cw(c6895.63,9248.5) 6887.63,9433.5 ; P6.1@6725.43,9274 cw(c6890.68,9278.25) 6886.43,9443.5 ; P6.1@6731.54,9309.48 ccw(c6698.95,9358.92) 6756.96,9347 ccw(c6814.96,9335.08) P6.1@6765.51,9302.5 ; P6.1@6737.04,9301.13 ccw(c6717.74,9330.42) 6752.09,9323.35 ccw(c6786.45,9316.29) P6.1@6757.16,9296.99 ; P6.1@6737.33,9301.32 ccw(c6707.85,9348.49) 6762.22,9336.74 ; P6.1@6738.1,9301.76 ccw(c6713.46,9347.09) 6763.14,9333.19 ; P6.1@6745.03,9289 cw(c6888.58,9289.95) 6887.63,9433.5 ; P6.1@6748.23,9272 cw(c6893.13,9279.1) 6886.03,9424 ; P6.1@6756.23,9308.5 cw(c6905.68,9287.55) 6815.31,9408.41 ; 6760.68,9329.6 ccw(c6796.14,9321.94) P6.1@6765.65,9302.29 ; 6762.72,9331.67 ccw(c6801.55,9320.81) P6.1@6766.41,9301.03 ; P6.1@6767.43,9278 cw(c6905.28,9295.65) 6887.63,9433.5 ; 7038.73,9433.5 7039.23,9434
  Top Layer w20: P6.1@6734.23,9310.5 cw(c6877.78,9278.45) 6759.26,9365.54 ; 6739.68,9322.48 ccw(c6768.33,9309.45) P6.1@6744.68,9288.69 ; 6752.49,9350.66 ccw(c6793.85,9331.86) P6.1@6759.71,9301.88
  Top Layer w30: 6898.63,9433.5 ccw(c6881.33,9796.2) 7029.98,9464.91 ; 6960.31,9433.5 cw(c6960.31,9342.17) 7024.88,9406.75 ; 6969.96,9433.5 ccw(c6969.96,9511.17) 7024.88,9456.25 ; 7027.54,9399.08 ccw(c6911.43,9228.7) 6887.63,9433.5 7038.73,9433.5
NetR1_2: R1.2 U5.3 U5.4 | length 122.2
  Top Layer w22: U5.4@5403.03,9464.5 R1.2@5403.03,9557.74
  Top Layer w40: U5.4@5413.43,9463.5 U5.3@5442.43,9463.5
NetR3_1: R3.1 U3.56 | length 241.7
  Top Layer w15: U3.56@5719.03,8860.25 5719.62,8860.84 5765.28,8860.84 5778.63,8874.19 5778.63,8888.3 ; 5791.02,8900.68 cw(c5808.03,8883.67) R3.1@5822.23,8903.09 ; R3.1@5809.09,8895.67 ccw(c5794.33,8886.76) 5794.33,8904 ; R3.1@5809.09,8912.33 cw(c5794.33,8921.24) 5794.33,8904 ; R3.1@5813.38,8890.98 ccw(c5797.57,8869.36) 5778.63,8888.3 ; R3.1@5826.83,8904 5794.33,8904 ; 5778.63,8888.3 5794.33,8904
NetR4_1: R4.1 U3.61 | length 226.8
  Top Layer w15: U3.61@5660.14,9021.5 5755.45,9116.81 ccw(c5705.75,9166.5) R4.1@5776.03,9166.5 ; R4.1@5762.71,9153.39 cw(c5754.21,9141.51) 5768.32,9137.72 cw(c5791.15,9131.61) R4.1@5779.82,9152.35
NetR5_1: R5.1 U4.3 | length 310
  Top Layer w10: U4.3@5568.17,9740.34 cw(c5573.38,9671.95) 5641.43,9680.5 ; U4.3@5654.83,9749 ccw(c5721.38,9750.49) 5667.65,9711.2
  Top Layer w40: U4.3@5611.03,9784 5599.43,9772.4 5599.43,9762.5 5654.43,9707.5 R5.1@5654.43,9646.5
NetU3_36: U3.36 VOUT1.1 | length 1099.5
  Top Layer w15: 5557.78,8097.72 U3.36@5557.78,8417.5 ; 5558.26,8097.24 ccw(c5705.18,8103.05) 5604.2,7996.17 5697.94,7902.44 ; 5698.21,7902.71 cw(c5616.38,7813.85) 5737.03,7808 VOUT1.1@5737.03,7712.6 ; VOUT1.1@5700.63,7730.5 ccw(c5623.88,7814.25) 5707.63,7891 ; 5734.83,7834 ccw(c5912.73,7847.9) VOUT1.1@5776.89,7732.19 ; 5745.03,7784 ccw(c5768.98,7772.45) VOUT1.1@5757.43,7748.5
OSK: P1.31 U3.30 | length 1603.3
  Top Layer w10: v3(5372.83,8296) 5404.24,8327.4 U3.30@5404.24,8417.5 ; v3@5372.83,8306 ccw(c5372.83,8330.14) 5389.9,8313.07 ccw(c5406.98,8296) v3@5382.83,8296
  Bottom Layer w10: P1.31@4088.83,8650.5 4134.86,8604.47 4640.46,8604.47 4948.93,8296 v3(5372.83,8296)
PMODE: P1.12 U3.70 | length 1573
  Top Layer w10: v3(5427.83,9124) 5431.1,9120.73 5431.1,9022.77 U3.70@5429.83,9021.5 ; U3.70@5428.06,9054.77 ccw(c5420.72,9062.11) 5431.1,9062.11
  Bottom Layer w10: P1.12@4190.03,9643.5 4199.03,9652.5 4587.33,9652.5 5115.83,9124 v3(5427.83,9124)
RD: P1.29 U3.22 | length 1499.8
  Top Layer w10: P1.29@4088.83,8725.97 cw(c4088.83,8666.76) 4130.7,8708.63 cw(c4172.58,8750.5) P1.29@4113.36,8750.5 ; P1.29@4088.83,8735.97 cw(c4088.83,8700.9) 4113.63,8725.7 cw(c4138.43,8750.5) P1.29@4103.36,8750.5 ; P1.29@4088.83,8750.5 4140.33,8699 4622.63,8699 4984.63,8337 5181.13,8337 5199.51,8355.38 U3.22@5199.51,8417.5
RESET: P1.14 U3.71 | length 1521.8
  Top Layer w10: v6(5403.6,9094) 5404.24,9093.36 U3.71@5404.24,9021.5
  Bottom Layer w10: P1.14@4188.83,9550.5 4599.73,9550.5 5056.73,9093.5 5392.23,9093.5 5403.6,9082.13 v6(5403.6,9094) ; 5384.29,9093.5 ccw(c5384.29,9113.31) v6@5398.3,9099.3 ; 5386.7,9093.5 cw(c5386.7,9077.1) v6@5398.3,9088.7
UDCLK: P1.27 U3.20 | length 1329.3
  Top Layer w10: P1.27@4088.83,8825.97 cw(c4088.83,8766.76) 4130.7,8808.63 cw(c4172.58,8850.5) P1.27@4113.36,8850.5 ; P1.27@4088.83,8835.97 cw(c4088.83,8800.9) 4113.63,8825.7 cw(c4138.43,8850.5) P1.27@4103.36,8850.5 ; P1.27@4088.83,8850.5 4141.33,8798 4608.43,8798 4930.04,8476.39 U3.20@5115.03,8476.39
VINN: P6.3 R6.2 U3.43 | length 1675
  Top Layer w10: U3.43@5751.43,8527.5 cw(c5754.2,8377.47) R6.2@5904.23,8380.24
  Bottom Layer w15: v3(5815.5,8516.19) cw(c6235.18,8097.55) 6159.64,8685.5 6625.23,8685.5 ccw(c6623.43,8807.1) 6745.03,8808.9 P6.3@6745.03,9089 ; v3@5815.91,8523.68 ccw(c5816.9,8541.76) 5828.99,8528.28 ccw(c5841.07,8514.8) v3@5822.99,8515.79 ; P6.3@6729.46,9073.42 cw(c6691.85,9035.82) 6745.03,9035.82 cw(c6798.21,9035.82) P6.3@6760.61,9073.42
VINP: P4.3 R7.2 U3.42 | length 1315.1
  Top Layer w10: U3.42@5719.57,8499.7 cw(c5741.43,8407) R7.2@5836.01,8395.79
  Bottom Layer w15: v3(5814.03,8468) cw(c5847.43,8354.6) 5960.83,8388 ; v3@5819.18,8473.45 ccw(c5831.62,8486.61) 5832.13,8468.51 ccw(c5832.64,8450.41) v3@5819.48,8462.85 ; 5961.04,8388.08 ccw(c6149.43,8459) 6138.43,8258 P4.3@6740.23,8258 ; P4.3@6725.66,8242.42 ccw(c6688.05,8204.82) 6688.05,8258 ccw(c6688.05,8311.18) P4.3@6725.66,8273.58
WR: P1.30 U3.21 | length 1335.4
  Top Layer w10: P1.30@4188.83,8753 4196.33,8745.5 4616.03,8745.5 5004.03,8357.5 5161.13,8357.5 5173.92,8370.29 U3.21@5173.92,8417.5 ; P1.30@4199.11,8760.77 ccw(c4235.98,8797.64) 4235.98,8745.5 ccw(c4235.98,8703.36) P1.30@4206.18,8733.16 ; P1.30@4206.18,8767.84 ccw(c4260.12,8821.79) 4260.12,8745.5
pads on no net: P1.11 P2.1 P2.2 P2.3 P2.4 P2.5 P2.6 P2.7 P2.8 P2.9 P2.10 P2.11 P2.12 P2.13 P2.14 P2.15 P2.16 P2.17 P2.18 P2.19 P2.20 U3.13 U3.35 U3.57 U3.58 U3.63 U4.1 U5.1
copper on no net:
  other v4: 4961.4,8143 5906.2,9394.5

## Polygon pours and split planes (outlines as drawn)
NetC34_1 on Top Layer "GND" (solid, remove dead copper, pour order 24): 6024.03,9266.5 6024.83,9265.7 6024.83,9010 6033.93,9010 6041.43,9017.5 6043.03,9019.1 6043.03,9053 6047.83,9053 6126.83,9132 6129.83,9135 6180.43,9135 6180.43,9296.4 6182.03,9298 6181.03,9299 6168.83,9299 6166.63,9299 6132.63,9265 6131.63,9266 6023.23,9266
NetC20_1 on Top Layer "GND" (solid, remove dead copper, pour order 22): 6091.43,8246.5 6179.63,8158.3 6179.63,8114 6179.63,8127.2 6078.83,8228 6083.23,8232.4 6083.23,8243.5 6088.83,8243.5 6091.83,8246.5
NetC20_1 on Top Layer "GND" (solid, remove dead copper, pour order 20): 6109.68,8146.6 6109.68,8126.12 6057.88,8069.4 6058.43,8070 6191.26,8070 6179.63,8070 6109.68,8146.6
NetC21_2 on Top Layer "GND" (solid, remove dead copper, pour order 30): 6444.53,8112.5 6508.03,8112.5 6504.53,8109 6504.53,8082.5 6504.53,8078 6480.53,8054 6455.53,8054
NetC20_1 on Top Layer "GND" (solid, remove dead copper, pour order 29): 6174.53,8093 6175.03,8092.5 6218.53,8092.5 6218.53,8072.87 6230.03,8061.29 6229.53,8060.79 6229.53,8017.5 6174.03,8017.5
NetC10_2 on Top Layer "GND" (solid, remove dead copper, pour order 27): 6407.03,8645.5 6537.03,8645.5 6537.03,8506.5 6536.03,8505.5 6407.03,8505.5 6407.03,8506.5 6407.03,8507.5
NetC9_2 on Top Layer "GND" (solid, remove dead copper, pour order 26): 6253.03,8644.5 6377.03,8644.5 6377.03,8504.5 6376.03,8505.5 6252.03,8505.5
NetC27_1 on Top Layer "GND" (solid, remove dead copper, pour order 23): 6147.03,8787.5 6227.03,8787.5 6227.03,8727.5 6158.03,8727.5 6157.03,8728.5 6148.03,8737.5 6148.03,8787.5
NetC28_2 on Top Layer "GND" (solid, remove dead copper, pour order 21): 6413.03,8735.5 6413.03,8860.5 6415.03,8860.5 6453.03,8898.5 6454.03,8897.5 6491.03,8897.5 6491.03,8893.5 6535.03,8849.5 6535.03,8735.5 6412.03,8735.5
NetC27_2 on Top Layer "GND" (solid, remove dead copper, pour order 18): 6255.53,8735 6258.68,8738.05 6258.68,8859.93 6260.78,8859.93 6298.58,8896.5 6299.63,8895.48 6343.73,8895.48 6381.53,8858.92 6381.53,8735 6256.58,8735
NetC27_1 on Top Layer "GND" (solid, remove dead copper, pour order 17): 6015.03,8734.92 6108.03,8861.5 6108.03,8734.92 6105.52,8731.5 6103.01,8734.92 6015.03,8734.92
NetC27_1 on Top Layer "GND" (solid, remove dead copper, pour order 16): 6107.22,8940.38 6108.41,8941.5 6227.03,8941.5 6227.03,8772.99 6183.14,8731.5 6106.03,8731.5 6106.03,8939.26 6107.22,8940.38
DVDDIN on Top Layer "GND" (solid, remove dead copper, pour order 19): 4039.23,10199.5 4234.23,10198.5 4234.23,10008.5 4039.23,10007.5 4040.63,10198.5
DGND on Top Layer "GND" (hatched 90Degree grid 20 track 8, remove dead copper, pour order 25): 3977.8,10606.5 7502.8,10606.5 7502.8,7530.5 7506.8,7526.5 3977.8,7526.5
DGND on Bottom Layer "GND" (hatched 90Degree grid 20 track 8, remove dead copper, pour order 28): 3972.4,10611 6483.1,10611 6490.6,10603.5 6468.2,10581.1 6468.2,10005 6468,10005 6353,9890 6338,9875 6202.8,9875 6202.8,9872.3 5990,9659.5 5982.6,9652.1 5982.6,9129 5854.7,9129 5767.2,9041.5 5677.7,8952 5676.4,8952 5676.4,8609.8 5523.6,8457 5520,8453.4 5520,7993.5 5520,7967.7 5580.2,7907.5 5582.2,7905.5 5582.2,7531.5 3979.4,7531.5

## Keep-outs
Keep-Out Layer:
  lines w8: 3970,7520 7480,7520 7510,7520 7510,10620 4000,10620 3970,10620 3970,7520

## Other copper
Top Layer:
  rectangle net AVDDIN: 4058.23,8421 4224.23,8581
  rectangle net DVDD: 5324.43,8990 5348.23,9049
  rectangle net NetC35_2: 6441.53,9145 6505.03,9234.5
  rectangle net NetC34_2: 6285.53,9148.5 6353.03,9241
  rectangle net NetC20_2: 6275.53,8131.5 6376.03,8192
  rectangle net NetC20_2: 6280.53,8193.5 6376.53,8197.5
  rectangle net NetC21_2: 6450.53,8058.5 6495.53,8060
  rectangle net NetC21_2: 6450.03,8093 6496.53,8100.5
  rectangle net NetC10_2: 6441.03,8489 6455.53,8509.5
  rectangle net NetC21_2: 6431.77,8111 6531.53,8197.5
  rectangle net DGND: 5227.6,8903.5 5273,8924.5
  rectangle net DGND: 5217.8,8907 5307.6,9061
  rectangle net AVDDIN: 4445,8172 4462,8193
  rectangle net AVDDIN: 4455.4,8189.5 4474.6,8204
  rectangle net AVDDIN: 4441.4,8173.5 4474.8,8191.5
  rectangle net DGND: 5480.6,8379.5 5505.8,8472.5
  rectangle net AVDD: 5580.2,8378.5 5612.4,8460
  rectangle net DGND: 5282.4,8522.69 5307.4,8540.5
  rectangle net DGND: 5076,8681.11 5283.19,8713.5
  rectangle net DGND: 5499.2,8913.89 5527.8,9060
  rectangle net AVDD: 5553.4,8976.39 5583.37,9057.5
  text "AD9854_V2.1" at 6082.4,7735.5 h60
  text "Data: 2013.09.05" at 6082.4,7615.5 h60
Bottom Layer:
  text "DY ZRT WHU" at 6680,7730 h60

## Silkscreen, mask and mechanical layers (free items; w line width, h text height)
Top Overlay:
  circle w5: c4977.92,7823 r157.48
  circle w5: c4553.52,8402 r157.48
  circle w5: c6296.75,10124 r157.48
  circle w5: c4768.92,10134.5 r157.48
  lines w8: 4037,10010.5 4234.7,10010.5 ; 4038.4,9701 4238.6,9701 ; 4038.83,8413.5 4235.5,8413.5 ; 4883.2,8743 5434.35,9294.16 ; 4886.9,8744 5430.95,8199.95 5982.1,8751.1 5438.95,9294.25
  text "+" at 4831.8,10299 h25
  text "+" at 6374.2,10266 h25
  text "DVDD" at 4294.6,10096.5 h60
  text "DGND" at 4296,9808.5 h60
  text "PMODE" at 4282.6,9624.5 h60
  text "D7" at 4281.2,9523 h60
  text "RESET" at 4461.8,9522 h60
  text "D5" at 4280.4,9437 h60
  text "D6" at 4461.8,9435 h60
  text "D3" at 4279.6,9322.5 h60
  text "D4" at 4461.8,9322 h60
  text "D2" at 4460.6,9225 h60
  text "D1" at 4278.8,9224 h60
  text "D0" at 4461.8,9124.5 h60
  text "A5" at 4275.8,9120 h60
  text "A4" at 4464.2,9024.5 h60
  text "A3" at 4278,9021 h60
  text "A2" at 4462.6,8926 h60
  text "A1" at 4279.8,8921 h60
  text "A0" at 4605.8,8832 h60
  text "UDCLK" at 4276.8,8829.5 h60
  text "RD" at 4281.2,8718 h60
  text "WR" at 4498.6,8716.5 h60
  text "OSK" at 4281.8,8613 h60
  text "FSK" at 4495.6,8610.5 h60
  text "AVDD" at 4294.6,8489.5 h60
  text "+" at 4340,8400 h60
  text "GND" at 4267.4,8367.5 h60 r270
  text "+" at 5010.6,7973.5 h25
Bottom Solder:
  rectangle: 5231.2,8546 5591.6,8911

## Text inside footprints (layer, text, board x,y; h text height)
P1: Top Overlay "1" at 4068.83,10250.5 h25 r270; Top Overlay "2" at 4168.83,10250.5 h25 r270; Top Overlay "40" at 4168.83,8170.5 h25 r270; Top Overlay "39" at 4068.83,8170.5 h25 r270
U1: Top Overlay "*" at 5121,10514.5 h25 r270
U2: Top Overlay "*" at 4771.8,8166.5 h25 r180
U3: Top Overlay "*" at 5092.03,9004.5 h25